# Altium PCB 10515.0461_全联供输出板_V1.0.PcbDoc (part 4 of 4)
Units mm, origin at the board's own origin, x right, y up, seen from the top; angles counter-clockwise.
Board outline 141.98 x 134.8 mm, 2 copper layers (Top Layer, Bottom Layer); 149 components, 131 nets, 632 pads, 485 vias.
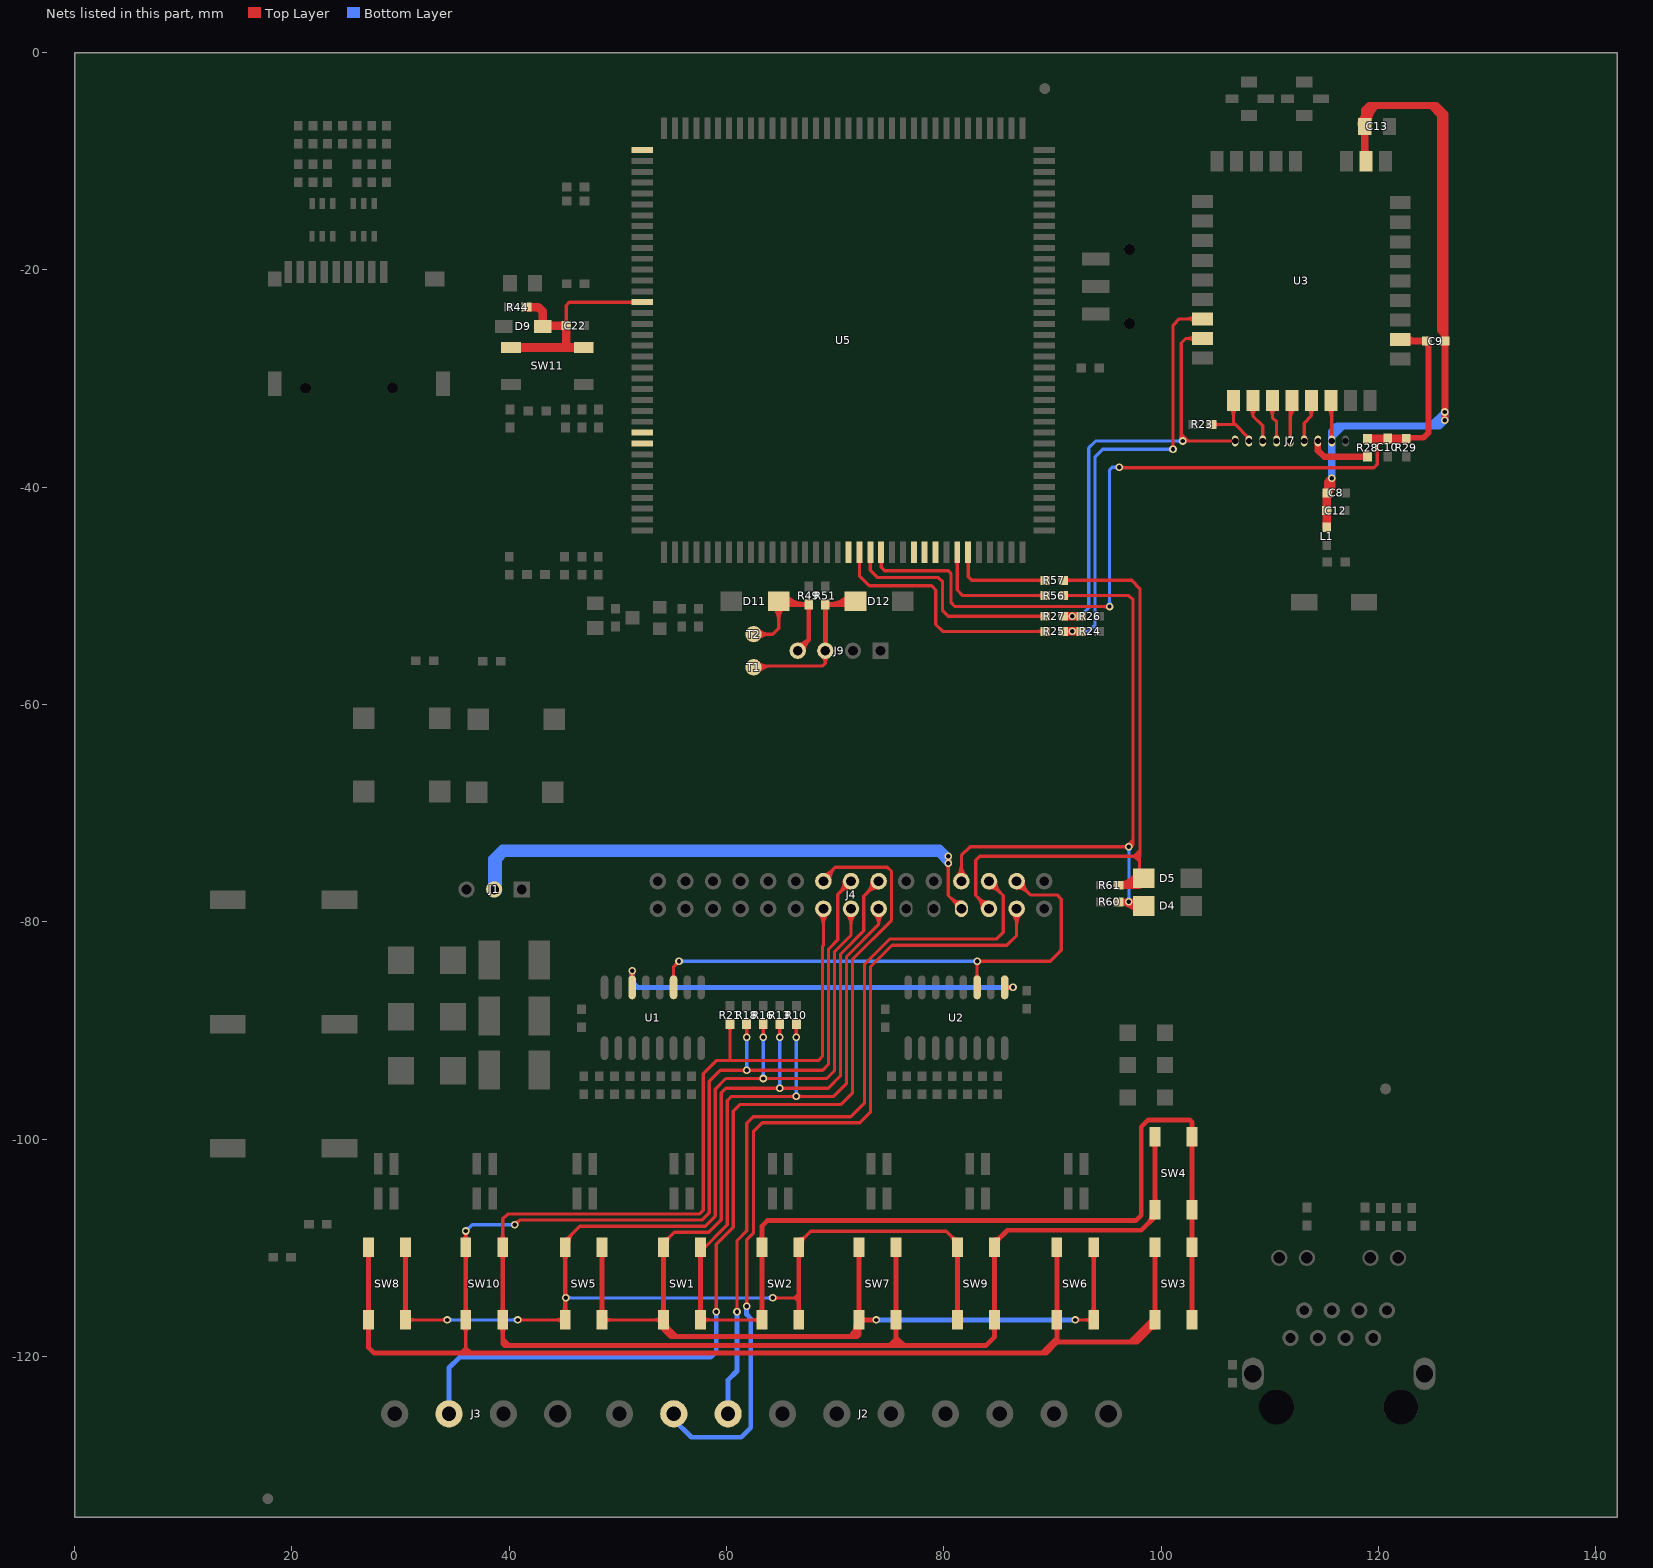
[diagram p4: the nets of this part, all layers, seen from the top]

## Via types
v1: diameter 0.7, hole 0.4, Top Layer to Bottom Layer, tented both sides, 485 vias

## Nets (pads, with @x,y where several pads share a name; then routed paths per layer and width w, separated by ;. In a path a pad name is that pad's centre, name@x,y a point inside that pad or via, vN(x,y) a via of type N, cw(c..) or ccw(c..) an arc to the next point about the centre after c; other vN are vias at no path point) (continued)
O_LED_SRCLK: J4.28 U1.11 U2.11 | length 57.8
  Top Layer w0.3: U1.11@54.977,-85.141 ccw(c54.635,-84.799) 55.118,-84.799 ccw(c55.601,-84.799) U1.11@55.259,-85.141 ; U1.11@55.118,-86.032 55.118,-84.127 v1(55.626,-83.619) ; v1@55.426,-83.619 cw(c54.943,-83.619) 55.285,-83.96 cw(c55.626,-84.302) v1@55.626,-83.819 ; U2.11@82.917,-85.141 ccw(c82.575,-84.799) 83.058,-84.799 ccw(c83.541,-84.799) U2.11@83.199,-85.141 ; v1@82.917,-83.76 cw(c82.575,-84.102) 83.058,-84.102 cw(c83.541,-84.102) 83.199,-83.76 cw(c83.541,-84.102) 83.541,-83.619 cw(c83.541,-83.136) v1@83.199,-83.478 ; U2.11@83.058,-86.032 v1(83.058,-83.619) 89.789,-83.619 90.805,-82.603 90.805,-77.904 90.424,-77.523 87.963,-77.523 J4.28@86.693,-76.253 ; J4.28@86.693,-76.865 cw(c86.693,-78.343) 87.738,-77.298 cw(c88.782,-76.253) J4.28@87.305,-76.253
  Bottom Layer w0.3: v1(55.626,-83.619) v1(83.058,-83.619) ; v1@55.767,-83.76 cw(c56.109,-84.102) 56.109,-83.619 cw(c56.109,-83.136) v1@55.767,-83.478 ; v1@82.917,-83.76 ccw(c82.575,-84.102) 82.575,-83.619 ccw(c82.575,-83.136) v1@82.917,-83.478
ONOFF: U5.1
OUTPUT_VOULTAGE: J3.3 J4.14 | length 96.6
  Top Layer w0.3: v1@58.914,-115.736 ccw(c58.572,-115.394) 59.055,-115.394 ccw(c59.538,-115.394) v1@59.196,-115.736 ; v1(59.055,-115.877) 59.055,-109.675 60.625,-108.105 60.625,-97.416 61.222,-96.819 70.493,-96.819 71.596,-95.716 71.596,-83.418 75.184,-79.83 75.184,-75.364 74.795,-74.975 69.985,-74.975 ; J4.14@68.913,-76.253 68.913,-76.047 69.985,-74.975 ; J4.14@68.913,-75.641 ccw(c68.913,-74.661) 69.606,-75.354 ; J4.14@69.224,-76.231 cw(c70.239,-76.16) 69.52,-75.44 ; J4.14@69.523,-76.21 cw(c71.108,-76.099) 69.985,-74.975
  Bottom Layer w0.45: J3.3@34.457,-125.275 34.457,-121.044 35.433,-120.068 58.547,-120.068 59.055,-119.56 v1(59.055,-115.877)
"PROG EN": J7.8 R23.2 U3.18 | length 9.6
  Top Layer w0.3: R23.2@104.629,-34.216 106.807,-34.216 ; R23.2@104.848,-34.397 cw(c105.286,-34.835) 105.286,-34.216 cw(c105.286,-33.597) R23.2@104.848,-34.035 ; U3.18@106.335,-32.676 cw(c105.567,-33.444) 106.653,-33.444 cw(c107.739,-33.444) U3.18@106.971,-32.676 ; U3.18@106.653,-32.008 106.653,-34.062 106.807,-34.216 ; 107.783,-35.192 cw(c107.434,-35.54) J7.8@107.927,-35.54 ; J7.8@108.077,-35.74 108.077,-35.486 106.807,-34.216
"PROG RESET": J7.3 R28.1 | length 5.7
  Top Layer w0.6: J7.3@114.427,-35.74 114.427,-36.629 114.998,-37.2 R28.1@118.999,-37.2
RESET_KEY: C22.2 D9.2 R44.1 SW11.1 SW11.2 U5.15 | length 24.7
  Top Layer w0.3: C22.2@45.056,-24.941 ccw(c44.618,-24.503) 45.237,-24.503 ccw(c45.856,-24.503) C22.2@45.419,-24.941 ; C22.2@45.237,-25.122 45.237,-23.269 45.537,-22.969 U5.15@52.232,-22.969 ; U5.15@51.419,-23.057 ccw(c51.205,-23.271) 51.205,-22.969 ccw(c51.205,-22.667) U5.15@51.419,-22.881
  Top Layer w0.8: SW11.2@40.16,-27.131 SW11.1@46.86,-27.131 ; R44.1@41.592,-23.421 42.672,-23.421 43.075,-23.824 D9.2@43.075,-25.199 ; D9.2@43.152,-25.122 C22.2@45.237,-25.122 45.237,-26.979 ; D9.2@43.416,-25.34 cw(c43.944,-25.868) 43.944,-25.122
RS485_CTRL3: U5.62
RS485_CTRL4: U5.54
RS485A2: J2.9 J4.27 | length 81.3
  Top Layer w0.3: v1@61.708,-115.228 ccw(c61.366,-114.886) 61.849,-114.886 ccw(c62.332,-114.886) v1@61.99,-115.228 ; v1@61.849,-115.242 61.849,-109.273 62.469,-108.653 62.469,-99.309 63.297,-98.481 72.26,-98.481 73.258,-97.483 73.258,-84.107 75.224,-82.141 85.806,-82.141 86.693,-81.254 J4.27@86.693,-78.793 ; J4.27@86.26,-79.226 cw(c85.215,-80.27) 86.693,-80.27 cw(c88.17,-80.27) J4.27@87.126,-79.226
  Bottom Layer w0.45: J2.9@55.144,-125.275 55.144,-125.809 56.769,-127.434 61.341,-127.434 62.23,-126.545 62.23,-116.512 61.849,-116.131 v1(61.849,-115.369)
RS485B2: J2.8 J4.26 | length 74.2
  Top Layer w0.3: v1@60.819,-115.736 ccw(c60.477,-115.394) 60.96,-115.394 ccw(c61.443,-115.394) v1@61.101,-115.736 ; v1(60.96,-115.877) 60.96,-109.337 61.849,-108.448 61.849,-98.533 62.455,-97.927 71.417,-97.927 72.704,-96.64 72.704,-83.877 74.994,-81.587 84.836,-81.587 85.471,-80.952 85.471,-77.571 J4.26@84.153,-76.253 ; J4.26@84.153,-76.865 cw(c84.153,-78.343) 85.198,-77.298 cw(c86.242,-76.253) J4.26@84.765,-76.253
  Bottom Layer w0.45: J2.8@60.144,-125.275 60.144,-122.154 60.96,-121.338 v1(60.96,-115.877)
RSDADIO3: J7.4 U3.22 | length 6.2
  Top Layer w0.3: J7.4@113.051,-35.434 ccw(c112.795,-35.178) 113.157,-35.178 ccw(c113.519,-35.178) J7.4@113.263,-35.434 ; J7.4@113.157,-35.74 113.157,-34.089 113.824,-33.422 ; U3.22@113.511,-32.681 cw(c112.793,-33.422) 113.824,-33.422 ; U3.22@113.824,-32.008 113.824,-33.422 ; U3.22@114.138,-32.681 ccw(c114.856,-33.422) 113.824,-33.422
RXD4: D4.1 J4.24 R56.2 R60.1 | length 65.9
  Top Layer w0.3: J4.24@81.18,-75.82 ccw(c80.135,-74.775) 81.613,-74.775 ccw(c83.09,-74.775) J4.24@82.046,-75.82 ; J4.24@81.613,-76.253 81.613,-73.888 82.423,-73.078 97.155,-73.078 97.417,-72.816 ; R56.2@90.995,-49.964 97.028,-49.964 97.417,-50.353 97.417,-72.443 ; R56.2@91.215,-50.145 cw(c91.653,-50.583) 91.653,-49.964 cw(c91.653,-49.345) R56.2@91.215,-49.783 ; v1@96.887,-73.219 ccw(c96.545,-73.561) 96.545,-73.078 ccw(c96.545,-72.595) v1@96.887,-72.937 ; v1@96.893,-72.959 96.901,-72.959 97.417,-72.443 ; v1@97.013,-72.879 ccw(c96.98,-72.443) 97.417,-72.443 ; v1@97.036,-73.178 ccw(c97.005,-72.766) 97.417,-72.766 ; v1@97.094,-72.889 ccw(c97.197,-72.596) 97.417,-72.816 ; v1@97.225,-73.045 cw(c97.903,-72.929) 97.417,-72.443 ; 97.417,-72.816 97.417,-72.443
  Top Layer w0.65: R60.1@95.948,-78.158 D4.1@98.273,-78.158 ; R60.1@95.992,-78.158 cw(c95.992,-80.847) D4.1@97.893,-78.946 ; D4.1@98.273,-78.412 D4.1@98.4,-78.539
  Bottom Layer w0.3: v1@96.887,-78.017 ccw(c96.545,-77.675) 97.028,-77.675 ccw(c97.511,-77.675) v1@97.169,-78.017 ; v1@96.887,-73.219 cw(c96.545,-73.561) 97.028,-73.561 cw(c97.511,-73.561) v1@97.169,-73.219 ; v1(97.028,-78.158) v1(97.028,-73.078)
SCLKDIO1: J7.6 U3.20 | length 6.2
  Top Layer w0.3: U3.20@109.921,-32.676 cw(c109.152,-33.444) 110.239,-33.444 cw(c111.325,-33.444) U3.20@110.557,-32.676 ; U3.20@110.239,-32.008 110.239,-33.584 110.617,-33.962 J7.6@110.617,-35.74 ; J7.6@110.511,-35.434 ccw(c110.255,-35.178) 110.617,-35.178 ccw(c110.979,-35.178) J7.6@110.723,-35.434
SCSEDIO0: J7.7 U3.19 | length 6.4
  Top Layer w0.3: U3.19@108.128,-32.677 cw(c107.366,-33.442) 108.446,-33.442 ; U3.19@108.446,-32.008 108.446,-33.442 ; U3.19@108.764,-32.677 ccw(c109.526,-33.442) 108.446,-33.442 ; J7.7@109.241,-35.434 ccw(c108.985,-35.178) 109.347,-35.178 ccw(c109.709,-35.178) J7.7@109.453,-35.434 ; J7.7@109.347,-35.74 109.347,-34.343 108.446,-33.442
SER_OUT: U1.14 U2.9 | length 38.6
  Top Layer w0.45: U1.14@51.308,-86.032 v1(51.308,-84.508) ; U2.9@85.598,-86.032 v1(86.36,-86.032)
  Bottom Layer w0.45: v1(51.308,-84.508) 51.308,-85.524 51.816,-86.032 v1(86.36,-86.032)
SW1: J4.17 R10.1 SW1.1 SW1.2 SW2.1 SW2.2 SW3.1 SW3.2 SW4.1 SW4.2 | length 160.9
  Top Layer w0.3: SW1.1@57.599,-116.636 SW2.2@63.248,-116.636 SW2.2@63.248,-117.149 ; SW1.2@57.599,-110.348 60.071,-107.876 60.071,-96.446 60.452,-96.065 69.85,-96.065 71.042,-94.873 71.042,-83.189 73.993,-80.238 ; SW1.1@57.847,-116.884 cw(c58.444,-117.481) 58.444,-116.636 cw(c58.444,-115.791) SW1.1@57.847,-116.389 ; SW2.2@63,-116.884 ccw(c62.403,-117.481) 62.403,-116.636 ccw(c62.403,-115.791) SW2.2@63,-116.389 ; SW2.1@63.248,-109.936 SW2.1@63.248,-109.529 ; R10.1@66.24,-89.617 cw(c65.802,-90.055) 66.421,-90.055 cw(c67.04,-90.055) R10.1@66.602,-89.617 ; v1@66.28,-96.206 ccw(c65.938,-96.548) 65.938,-96.065 ccw(c65.938,-95.582) v1@66.28,-95.924 ; v1@66.28,-90.463 ccw(c65.938,-90.121) 66.421,-90.121 ccw(c66.904,-90.121) v1@66.562,-90.463 ; v1(66.421,-90.604) R10.1@66.421,-89.397 ; v1@66.562,-96.206 cw(c66.904,-96.548) 66.904,-96.065 cw(c66.904,-95.582) v1@66.562,-95.924 ; J4.17@73.567,-79.233 cw(c72.593,-80.238) 73.993,-80.238 ; J4.17@73.993,-78.793 73.993,-80.238 ; J4.17@74.419,-79.233 ccw(c75.393,-80.238) 73.993,-80.238
  Top Layer w0.45: SW1.1@57.405,-116.042 ccw(c56.935,-115.572) 57.599,-115.572 ccw(c58.263,-115.572) SW1.1@57.794,-116.042 ; SW1.2@57.405,-110.531 cw(c56.935,-111) 57.599,-111 cw(c58.263,-111) SW1.2@57.794,-110.531 ; SW1.1@57.599,-116.636 SW1.2@57.599,-110.348 ; SW2.2@63.053,-116.042 ccw(c62.584,-115.572) 63.248,-115.572 ccw(c63.912,-115.572) SW2.2@63.442,-116.042 ; SW2.1@63.053,-110.531 cw(c62.584,-111) 63.248,-111 cw(c63.912,-111) SW2.1@63.442,-110.531 ; SW2.1@63.053,-109.342 ccw(c62.584,-108.872) 63.248,-108.872 ccw(c63.912,-108.872) SW2.1@63.442,-109.342 ; SW2.2@63.248,-116.636 SW2.1@63.248,-109.936 63.248,-108.001 63.754,-107.495 97.663,-107.495 98.171,-106.987 98.171,-98.859 98.806,-98.224 102.616,-98.224 102.843,-98.451 SW4.2@102.843,-99.776 SW4.1@102.843,-106.476 SW3.2@102.843,-109.936 SW3.1@102.843,-116.636 ; SW3.1@102.648,-116.042 ccw(c102.179,-115.572) 102.843,-115.572 ccw(c103.507,-115.572) SW3.1@103.037,-116.042 ; SW3.2@102.648,-110.531 cw(c102.179,-111) 102.843,-111 cw(c103.507,-111) SW3.2@103.037,-110.531 ; SW3.2@102.648,-109.342 ccw(c102.179,-108.872) 102.843,-108.872 ccw(c103.507,-108.872) SW3.2@103.037,-109.342 ; SW4.1@102.648,-107.071 cw(c102.179,-107.54) 102.843,-107.54 cw(c103.507,-107.54) SW4.1@103.037,-107.071 ; SW4.1@102.648,-105.882 ccw(c102.179,-105.412) 102.843,-105.412 ccw(c103.507,-105.412) SW4.1@103.037,-105.882 ; SW4.2@102.648,-100.371 cw(c102.179,-100.84) 102.843,-100.84 cw(c103.507,-100.84) SW4.2@103.037,-100.371 ; SW4.2@102.648,-99.182 ccw(c102.179,-98.712) 102.843,-98.712 ccw(c103.507,-98.712) SW4.2@103.037,-99.182
  Bottom Layer w0.3: v1@66.28,-95.924 ccw(c65.938,-95.582) 66.421,-95.582 ccw(c66.904,-95.582) v1@66.562,-95.924 ; v1@66.28,-90.745 cw(c65.938,-91.087) 66.421,-91.087 cw(c66.904,-91.087) v1@66.562,-90.745 ; v1(66.421,-96.065) v1(66.421,-90.604)
SW2: J4.18 R13.1 SW1.3 SW1.4 SW5.1 SW5.2 SW6.1 SW6.2 SW7.1 SW7.2 | length 158.5
  Top Layer w0.3: SW5.1@48.55,-116.636 SW1.4@54.199,-116.636 ; SW5.1@48.798,-116.884 cw(c49.395,-117.481) 49.395,-116.636 cw(c49.395,-115.791) SW5.1@48.798,-116.389 ; SW1.4@53.952,-116.884 ccw(c53.354,-117.481) 53.354,-116.636 ccw(c53.354,-115.791) SW1.4@53.952,-116.389 ; SW1.3@54.199,-109.936 54.199,-109.557 55.199,-108.557 58.374,-108.557 59.517,-107.414 59.517,-95.73 59.944,-95.303 63.627,-95.303 69.342,-95.303 70.488,-94.157 70.488,-82.96 72.619,-80.829 72.619,-77.627 J4.18@73.993,-76.253 ; SW1.3@54.199,-109.186 ccw(c54.199,-108.291) 54.832,-108.924 ; SW1.3@54.549,-109.536 cw(c55.344,-109.536) 54.782,-108.974 ; R13.1@64.716,-89.617 cw(c64.278,-90.055) 64.897,-90.055 cw(c65.516,-90.055) R13.1@65.078,-89.617 ; v1@64.756,-95.444 ccw(c64.414,-95.786) 64.414,-95.303 ccw(c64.414,-94.82) v1@64.756,-95.162 ; v1@64.756,-90.463 ccw(c64.414,-90.121) 64.897,-90.121 ccw(c65.38,-90.121) v1@65.038,-90.463 ; v1(64.897,-90.604) R13.1@64.897,-89.397 ; v1@65.038,-95.444 cw(c65.38,-95.786) 65.38,-95.303 cw(c65.38,-94.82) v1@65.038,-95.162 ; J4.18@73.381,-76.253 cw(c71.903,-76.253) 72.948,-77.298 cw(c73.993,-78.343) J4.18@73.993,-76.865 ; v1(92.078,-116.636) SW6.1@93.794,-116.636 ; v1@92.219,-116.778 cw(c92.561,-117.119) 92.561,-116.636 cw(c92.561,-116.153) v1@92.219,-116.495 ; SW6.1@93.547,-116.884 ccw(c92.949,-117.481) 92.949,-116.636 ccw(c92.949,-115.791) SW6.1@93.547,-116.389
  Top Layer w0.45: SW5.1@48.356,-116.042 ccw(c47.886,-115.572) 48.55,-115.572 ccw(c49.214,-115.572) SW5.1@48.745,-116.042 ; SW5.2@48.356,-110.531 cw(c47.886,-111) 48.55,-111 cw(c49.214,-111) SW5.2@48.745,-110.531 ; SW5.1@48.55,-116.636 SW5.2@48.55,-109.936 ; SW1.4@54.005,-116.042 ccw(c53.535,-115.572) 54.199,-115.572 ccw(c54.863,-115.572) SW1.4@54.394,-116.042 ; SW1.3@54.005,-110.531 cw(c53.535,-111) 54.199,-111 cw(c54.863,-111) SW1.3@54.394,-110.531 ; SW1.4@54.199,-117.498 54.864,-118.163 55.372,-118.163 ; SW1.4@54.199,-117.311 cw(c54.199,-118.087) 54.747,-117.538 ; SW1.3@54.199,-109.936 SW1.4@54.199,-116.636 54.199,-116.99 55.372,-118.163 ; SW1.4@54.457,-117.131 ccw(c55.171,-117.394) 54.633,-117.932 ; SW1.4@54.474,-117.036 ccw(c55.027,-117.036) SW1.4@54.636,-117.427 ; 71.527,-118.01 ccw(c70.578,-117.061) SW7.2@71.92,-117.04 ; SW7.2@72,-117.231 cw(c71.531,-117.7) 72.195,-117.7 cw(c72.859,-117.7) SW7.2@72.389,-117.231 ; SW7.2@72,-116.042 ccw(c71.531,-115.572) 72.195,-115.572 ccw(c72.859,-115.572) SW7.2@72.389,-116.042 ; SW7.1@72,-110.531 cw(c71.531,-111) 72.195,-111 cw(c72.859,-111) SW7.1@72.389,-110.531 ; SW7.2@72.136,-117.401 71.374,-118.163 ; SW7.1@72.195,-109.936 SW7.2@72.195,-116.636 ; SW7.2@72.389,-116.831 cw(c72.859,-117.3) 72.859,-116.636 cw(c72.859,-115.972) SW7.2@72.389,-116.442 ; v1(73.784,-116.636) SW7.2@72.195,-116.636 ; SW6.1@93.6,-116.042 ccw(c93.13,-115.572) 93.794,-115.572 ccw(c94.458,-115.572) SW6.1@93.989,-116.042 ; SW6.2@93.6,-110.531 cw(c93.13,-111) 93.794,-111 cw(c94.458,-111) SW6.2@93.989,-110.531 ; SW6.1@93.794,-116.636 SW6.2@93.794,-109.936 ; 55.372,-118.163 71.374,-118.163 ; 71.374,-118.163 72.009,-118.163 72.195,-117.977 SW7.2@72.195,-116.636
  Bottom Layer w0.3: v1@64.756,-95.162 ccw(c64.414,-94.82) 64.897,-94.82 ccw(c65.38,-94.82) v1@65.038,-95.162 ; v1@64.756,-90.745 cw(c64.414,-91.087) 64.897,-91.087 cw(c65.38,-91.087) v1@65.038,-90.745 ; v1(64.897,-95.303) v1(64.897,-90.604)
  Bottom Layer w0.45: v1(73.784,-116.636) v1(92.078,-116.636)
SW3: J4.15 R16.1 SW2.3 SW2.4 SW5.3 SW5.4 SW8.1 SW8.2 SW9.1 SW9.2 | length 167.8
  Top Layer w0.3: SW8.1@30.453,-116.636 v1(34.29,-116.636) ; SW8.1@30.7,-116.884 cw(c31.298,-117.481) 31.298,-116.636 cw(c31.298,-115.791) SW8.1@30.7,-116.389 ; v1@34.149,-116.778 ccw(c33.807,-117.119) 33.807,-116.636 ccw(c33.807,-116.153) v1@34.149,-116.495 ; v1(40.767,-116.636) SW5.4@45.15,-116.636 ; v1@40.908,-116.778 cw(c41.25,-117.119) 41.25,-116.636 cw(c41.25,-116.153) v1@40.908,-116.495 ; SW5.4@44.903,-116.884 ccw(c44.305,-117.481) 44.305,-116.636 ccw(c44.305,-115.791) SW5.4@44.903,-116.389 ; SW5.3@45.15,-109.335 46.482,-108.003 58.039,-108.003 58.963,-107.079 58.963,-95.395 59.944,-94.414 69.215,-94.414 69.934,-93.695 69.934,-82.73 71.453,-81.211 J4.15@71.453,-78.793 ; SW5.3@45.15,-109.186 ccw(c45.15,-108.828) SW5.3@45.404,-109.081 ; SW5.3@45.5,-109.536 cw(c46.832,-109.536) 45.89,-108.595 ; R16.1@63.192,-89.617 cw(c62.754,-90.055) 63.373,-90.055 cw(c63.992,-90.055) R16.1@63.554,-89.617 ; v1@63.232,-94.555 ccw(c62.89,-94.897) 62.89,-94.414 ccw(c62.89,-93.931) v1@63.232,-94.273 ; v1@63.232,-90.463 ccw(c62.89,-90.121) 63.373,-90.121 ccw(c63.856,-90.121) v1@63.514,-90.463 ; v1(63.373,-90.604) R16.1@63.373,-89.397 ; v1@63.514,-94.555 cw(c63.856,-94.897) 63.856,-94.414 cw(c63.856,-93.931) v1@63.514,-94.273 ; v1(64.262,-114.607) 66.167,-114.607 ; v1@64.403,-114.748 cw(c64.745,-115.09) 64.745,-114.607 cw(c64.745,-114.124) v1@64.403,-114.466 ; 66.648,-114.988 66.267,-114.607 ; 66.648,-114.607 66.167,-114.607 ; 66.648,-114.226 66.267,-114.607 ; SW2.4@66.648,-109.936 66.648,-109.554 67.727,-108.475 80.228,-108.475 81.244,-109.491 SW9.1@81.244,-109.936 ; SW2.4@66.648,-109.186 ccw(c66.648,-108.298) 67.276,-108.926 ; SW2.4@66.998,-109.536 cw(c67.799,-109.536) 67.233,-108.969 ; J4.15@71.02,-79.226 cw(c69.975,-80.27) 71.453,-80.27 cw(c72.93,-80.27) J4.15@71.886,-79.226 ; 80.614,-108.861 cw(c79.939,-109.536) SW9.1@80.894,-109.536 ; 80.724,-108.971 ccw(c81.244,-108.451) SW9.1@81.244,-109.186 ; 66.167,-114.607 66.267,-114.607
  Top Layer w0.45: SW8.1@30.258,-116.042 ccw(c29.789,-115.572) 30.453,-115.572 ccw(c31.117,-115.572) SW8.1@30.647,-116.042 ; SW8.2@30.258,-110.531 cw(c29.789,-111) 30.453,-111 cw(c31.117,-111) SW8.2@30.647,-110.531 ; SW8.1@30.453,-116.636 SW8.2@30.453,-109.936 ; SW5.4@44.956,-116.042 ccw(c44.486,-115.572) 45.15,-115.572 ccw(c45.814,-115.572) SW5.4@45.345,-116.042 ; SW5.3@44.956,-110.531 cw(c44.486,-111) 45.15,-111 cw(c45.814,-111) SW5.3@45.345,-110.531 ; SW5.4@45.15,-116.636 SW5.3@45.15,-109.936 SW5.3@45.15,-109.335 ; 45.15,-115.058 cw(c45.663,-115.058) v1@45.3,-114.695 ; 45.15,-114.156 ccw(c45.663,-114.156) v1@45.3,-114.519 ; SW2.3@66.453,-116.042 ccw(c65.984,-115.572) 66.648,-115.572 ccw(c67.312,-115.572) SW2.3@66.842,-116.042 ; SW2.4@66.453,-110.531 cw(c65.984,-111) 66.648,-111 cw(c67.312,-111) SW2.4@66.842,-110.531 ; SW2.3@66.648,-116.636 66.648,-114.607 SW2.4@66.648,-109.936 ; SW9.2@81.049,-116.042 ccw(c80.58,-115.572) 81.244,-115.572 ccw(c81.908,-115.572) SW9.2@81.438,-116.042 ; SW9.1@81.049,-110.531 cw(c80.58,-111) 81.244,-111 cw(c81.908,-111) SW9.1@81.438,-110.531 ; SW9.2@81.244,-116.636 SW9.1@81.244,-109.936
  Bottom Layer w0.3: v1(34.29,-116.636) v1(40.767,-116.636) ; v1@34.431,-116.778 cw(c34.773,-117.119) 34.773,-116.636 cw(c34.773,-116.153) v1@34.431,-116.495 ; v1@40.626,-116.778 ccw(c40.284,-117.119) 40.284,-116.636 ccw(c40.284,-116.153) v1@40.626,-116.495 ; v1(45.212,-114.607) v1(64.262,-114.607) ; v1@45.353,-114.748 cw(c45.695,-115.09) 45.695,-114.607 cw(c45.695,-114.124) v1@45.353,-114.466 ; v1@63.232,-94.273 ccw(c62.89,-93.931) 63.373,-93.931 ccw(c63.856,-93.931) v1@63.514,-94.273 ; v1@63.232,-90.745 cw(c62.89,-91.087) 63.373,-91.087 cw(c63.856,-91.087) v1@63.514,-90.745 ; v1(63.373,-94.414) v1(63.373,-90.604) ; v1@64.121,-114.748 ccw(c63.779,-115.09) 63.779,-114.607 ccw(c63.779,-114.124) v1@64.121,-114.466
SW4: J4.16 R18.1 SW3.3 SW3.4 SW6.3 SW6.4 SW8.3 SW8.4 SW10.1 SW10.2 | length 211.3
  Top Layer w0.3: 35.492,-119.687 36,-119.179 ; SW10.2@35.752,-117.284 cw(c35.155,-117.881) 36,-117.881 cw(c36.845,-117.881) SW10.2@36.247,-117.284 ; SW10.1@35.752,-109.289 ccw(c35.155,-108.691) 36,-108.691 ccw(c36.845,-108.691) SW10.1@36.247,-109.289 ; v1@35.859,-108.593 cw(c35.517,-108.935) 36,-108.935 cw(c36.483,-108.935) v1@36.141,-108.593 ; 36,-119.619 36,-119.179 ; SW10.2@36,-116.636 36,-119.179 ; SW10.1@36,-109.936 v1(36,-108.452) ; 36.449,-119.628 36,-119.179 ; v1(40.513,-107.876) 40.94,-107.449 57.725,-107.449 58.409,-106.765 58.409,-94.679 59.436,-93.652 68.834,-93.652 69.38,-93.106 69.38,-82.501 70.231,-81.65 70.231,-77.475 J4.16@71.453,-76.253 ; v1@40.513,-107.676 ccw(c40.513,-107.193) 40.854,-107.535 ccw(c41.196,-107.876) v1@40.713,-107.876 ; R18.1@61.668,-89.617 cw(c61.23,-90.055) 61.849,-90.055 cw(c62.468,-90.055) R18.1@62.03,-89.617 ; v1@61.708,-93.793 ccw(c61.366,-94.135) 61.366,-93.652 ccw(c61.366,-93.169) v1@61.708,-93.511 ; v1@61.708,-90.463 ccw(c61.366,-90.121) 61.849,-90.121 ccw(c62.332,-90.121) v1@61.99,-90.463 ; v1(61.849,-90.604) R18.1@61.849,-89.397 ; v1@61.99,-93.793 cw(c62.332,-94.135) 62.332,-93.652 cw(c62.332,-93.169) v1@61.99,-93.511 ; J4.16@70.841,-76.253 cw(c69.363,-76.253) 70.408,-77.298 cw(c71.453,-78.343) J4.16@71.453,-76.865
  Top Layer w0.45: SW8.4@26.858,-117.231 cw(c26.389,-117.7) 27.053,-117.7 cw(c27.717,-117.7) SW8.4@27.247,-117.231 ; SW8.4@26.858,-116.042 ccw(c26.389,-115.572) 27.053,-115.572 ccw(c27.717,-115.572) SW8.4@27.247,-116.042 ; SW8.3@26.858,-110.531 cw(c26.389,-111) 27.053,-111 cw(c27.717,-111) SW8.3@27.247,-110.531 ; SW8.3@27.053,-109.936 SW8.4@27.053,-116.636 27.053,-119.181 27.559,-119.687 89.408,-119.687 90.394,-118.701 90.394,-118.671 ; SW10.2@35.805,-116.042 ccw(c35.336,-115.572) 36,-115.572 ccw(c36.664,-115.572) SW10.2@36.194,-116.042 ; SW10.1@35.805,-110.531 cw(c35.336,-111) 36,-111 cw(c36.664,-111) SW10.1@36.194,-110.531 ; SW10.2@36,-116.001 SW10.1@36,-109.936 ; 89.027,-119.687 90.394,-118.32 90.394,-118.163 ; SW6.4@90.2,-117.231 cw(c89.73,-117.7) 90.394,-117.7 cw(c91.058,-117.7) SW6.4@90.589,-117.231 ; SW6.4@90.2,-116.042 ccw(c89.73,-115.572) 90.394,-115.572 ccw(c91.058,-115.572) SW6.4@90.589,-116.042 ; SW6.3@90.2,-110.531 cw(c89.73,-111) 90.394,-111 cw(c91.058,-111) SW6.3@90.589,-110.531 ; SW6.3@90.394,-109.936 SW6.4@90.394,-116.636 90.394,-118.163 ; 97.859,-117.967 cw(c99.443,-119.552) 99.443,-117.311 ccw(c99.443,-118.019) 98.943,-117.518 ; 98.627,-117.199 cw(c99.443,-118.015) SW3.4@99.443,-116.861 ; SW3.4@98.986,-117.475 ccw(c98.547,-117.036) SW3.4@99.168,-117.036 ; SW3.4@99.19,-116.636 97.155,-118.671 ; SW3.4@99.248,-116.042 ccw(c98.779,-115.572) 99.443,-115.572 ccw(c100.107,-115.572) SW3.4@99.637,-116.042 ; SW3.3@99.248,-110.531 cw(c98.779,-111) 99.443,-111 cw(c100.107,-111) SW3.3@99.637,-110.531 ; SW3.3@99.443,-109.936 SW3.4@99.443,-116.636 99.443,-117.018 97.79,-118.671 97.155,-118.671 ; 90.394,-118.671 97.155,-118.671 ; 90.394,-118.671 90.394,-118.163
  Bottom Layer w0.3: v1(36,-108.452) 36.576,-107.876 v1(40.513,-107.876) ; v1@36,-108.252 ccw(c36,-107.769) 36.341,-108.111 ccw(c36.683,-108.452) v1@36.2,-108.452 ; v1@40.372,-108.017 ccw(c40.03,-108.359) 40.03,-107.876 ccw(c40.03,-107.393) v1@40.372,-107.735 ; v1@61.708,-93.511 ccw(c61.366,-93.169) 61.849,-93.169 ccw(c62.332,-93.169) v1@61.99,-93.511 ; v1@61.708,-90.745 cw(c61.366,-91.087) 61.849,-91.087 cw(c62.332,-91.087) v1@61.99,-90.745 ; v1(61.849,-93.652) v1(61.849,-90.604)
SW5: J4.13 R21.1 SW4.3 SW4.4 SW7.3 SW7.4 SW9.3 SW9.4 SW10.3 SW10.4 | length 178.5
  Top Layer w0.3: SW10.4@39.152,-109.289 ccw(c38.555,-108.691) 39.4,-108.691 ccw(c40.245,-108.691) SW10.4@39.647,-109.289 ; SW10.4@39.4,-109.936 39.4,-107.338 39.843,-106.895 57.496,-106.895 57.855,-106.536 57.855,-93.963 59.055,-92.763 68.453,-92.763 68.826,-92.39 68.826,-82.271 68.913,-82.184 J4.13@68.913,-78.793 ; R21.1@60.144,-89.617 cw(c59.706,-90.055) 60.325,-90.055 cw(c60.944,-90.055) R21.1@60.506,-89.617 ; 60.325,-92.763 R21.1@60.325,-89.397 ; J4.13@68.48,-79.226 cw(c67.435,-80.27) 68.913,-80.27 cw(c70.39,-80.27) J4.13@69.346,-79.226
  Top Layer w0.45: SW10.3@39.205,-117.231 cw(c38.736,-117.7) 39.4,-117.7 cw(c40.064,-117.7) SW10.3@39.594,-117.231 ; SW10.3@39.205,-116.042 ccw(c38.736,-115.572) 39.4,-115.572 ccw(c40.064,-115.572) SW10.3@39.594,-116.042 ; SW10.4@39.205,-110.531 cw(c38.736,-111) 39.4,-111 cw(c40.064,-111) SW10.4@39.594,-110.531 ; SW10.4@39.4,-109.936 SW10.3@39.4,-116.636 39.4,-118.417 ; 39.966,-118.983 39.4,-118.417 ; 75.029,-118.983 75.595,-118.417 ; SW7.3@75.4,-117.231 cw(c74.931,-117.7) 75.595,-117.7 cw(c76.259,-117.7) SW7.3@75.789,-117.231 ; SW7.3@75.4,-116.042 ccw(c74.931,-115.572) 75.595,-115.572 ccw(c76.259,-115.572) SW7.3@75.789,-116.042 ; SW7.4@75.4,-110.531 cw(c74.931,-111) 75.595,-111 cw(c76.259,-111) SW7.4@75.789,-110.531 ; 75.595,-118.886 75.595,-118.417 ; SW7.4@75.595,-109.936 SW7.3@75.595,-116.636 75.595,-118.417 ; 76.327,-118.983 75.761,-118.417 75.595,-118.417 ; SW9.3@84.449,-117.231 cw(c83.98,-117.7) 84.644,-117.7 cw(c85.308,-117.7) SW9.3@84.838,-117.231 ; SW9.3@84.449,-116.042 ccw(c83.98,-115.572) 84.644,-115.572 ccw(c85.308,-115.572) SW9.3@84.838,-116.042 ; SW9.4@84.449,-110.531 cw(c83.98,-111) 84.644,-111 cw(c85.308,-111) SW9.4@84.838,-110.531 ; SW9.4@84.644,-109.261 ccw(c84.644,-108.462) 85.209,-109.027 ; SW9.4@84.919,-109.536 cw(c85.447,-109.536) SW9.4@85.073,-109.163 ; 98.806,-107.749 ccw(c97.934,-106.876) SW4.4@99.168,-106.876 ; SW4.4@99.248,-105.882 ccw(c98.779,-105.412) 99.443,-105.412 ccw(c100.107,-105.412) SW4.4@99.637,-105.882 ; SW4.3@99.248,-100.371 cw(c98.779,-100.84) 99.443,-100.84 cw(c100.107,-100.84) SW4.3@99.637,-100.371 ; SW4.3@99.443,-99.776 SW4.4@99.443,-106.476 99.443,-107.112 98.171,-108.384 85.852,-108.384 84.644,-109.592 SW9.4@84.644,-109.936 SW9.3@84.644,-116.636 84.644,-118.228 83.889,-118.983 39.555,-118.983 39.4,-118.828 39.4,-118.417
"TCM310 RESET": C9.1 C10.2 R28.2 R29.2 U3.27 U5.57 | length 102.3
  Top Layer w0.3: U5.57@74.144,-46.782 cw(c73.93,-46.996) 74.232,-46.996 cw(c74.534,-46.996) U5.57@74.32,-46.782 ; U5.57@74.232,-45.969 74.232,-47.361 74.549,-47.678 80.391,-47.678 80.645,-47.932 80.645,-50.599 81.026,-50.98 v1(95.25,-50.98) ; v1@95.109,-51.121 ccw(c94.767,-51.463) 94.767,-50.98 ccw(c94.767,-50.497) v1@95.109,-50.839 ; v1@96.187,-38.201 118.999,-38.201 119.586,-38.201 119.888,-37.899 119.888,-35.549 ; v1@96.28,-38.294 cw(c96.505,-38.519) 96.505,-38.201 ; v1@96.28,-38.012 ccw(c96.739,-37.553) 96.739,-38.201 ; R29.2@122.736,-35.731 cw(c123.174,-36.169) 123.174,-35.549 cw(c123.174,-34.93) R29.2@122.736,-35.368 ; R29.2@122.736,-35.693 cw(c123.542,-36.498) 123.542,-35.359 ; C9.1@124.272,-26.408 124.41,-26.546 124.714,-26.85 124.714,-35.03 124.194,-35.549 122.174,-35.549 122.364,-35.549 122.555,-35.359 124.079,-35.359 124.46,-34.978 C9.1@124.46,-26.596 ; 124.46,-27.196 cw(c125.122,-27.196) C9.1@124.654,-26.727 ; 124.46,-27.134 ccw(c123.884,-27.134) 124.291,-26.727 cw(c123.271,-27.748) 124.714,-27.748 ; C9.1@124.504,-26.515 cw(c123.995,-27.023) 124.714,-27.023
  Top Layer w0.65: U3.27@122.003,-26.408 122.141,-26.546 124.41,-26.546 C9.1@124.435,-26.546 ; U3.27@122.547,-26.214 ccw(c123.35,-25.411) 123.35,-26.546
  Top Layer w0.8: R28.2@118.999,-35.549 119.888,-35.549 R29.2@122.174,-35.549
  Bottom Layer w0.3: v1@95.109,-50.839 ccw(c94.767,-50.497) 95.25,-50.497 ccw(c95.733,-50.497) v1@95.391,-50.839 ; v1(95.25,-50.98) 95.25,-38.407 95.504,-38.153 v1(96.139,-38.153) ; v1@95.998,-38.294 ccw(c95.656,-38.636) 95.656,-38.153 ccw(c95.656,-37.67) v1@95.998,-38.012
TCM310_RXD: R24.1 R25.2 U3.15 | length 45.3
  Top Layer w0.3: v1@100.951,-36.361 ccw(c100.609,-36.019) 101.092,-36.019 ccw(c101.575,-36.019) v1@101.233,-36.361 ; v1(101.092,-36.502) 101.092,-25.072 101.656,-24.508 U3.15@103.803,-24.508 ; U3.15@103.135,-24.826 ccw(c102.367,-25.594) 102.367,-24.508 ccw(c102.367,-23.422) U3.15@103.135,-24.19
  Top Layer w0.8: R25.2@90.995,-53.266 v1(91.821,-53.266) R24.1@92.646,-53.266
  Bottom Layer w0.3: v1(91.821,-53.266) 93.345,-53.266 93.899,-52.712 93.899,-37.218 94.615,-36.502 v1(101.092,-36.502) ; v1@91.962,-53.407 cw(c92.304,-53.749) 92.304,-53.266 cw(c92.304,-52.783) v1@91.962,-53.125 ; v1@100.951,-36.643 ccw(c100.609,-36.985) 100.609,-36.502 ccw(c100.609,-36.019) v1@100.951,-36.361
TCM310_TXD: J7.9 R26.1 R27.2 U3.16 | length 52.2
  Top Layer w0.3: 101.776,-35.396 cw(c101.953,-35.694) 102.198,-35.449 ; v1@101.93,-35.654 cw(c102.157,-36.035) 102.47,-35.721 ; 101.941,-35.192 cw(c101.542,-35.59) v1@102.076,-35.772 ; v1@102.097,-35.577 cw(c102.434,-35.105) 101.854,-35.105 ; v1@102.122,-35.881 cw(c102.464,-36.223) 102.464,-35.74 cw(c102.464,-35.257) v1@102.122,-35.599 ; 102.743,-35.74 102.489,-35.74 101.854,-35.105 ; U3.16@103.135,-26.626 ccw(c102.367,-27.394) 102.367,-26.308 ccw(c102.367,-25.222) U3.16@103.135,-25.99 ; U3.16@103.803,-26.308 102.269,-26.308 101.854,-26.723 101.854,-35.105 ; J7.9@106.701,-35.846 ccw(c106.445,-36.102) 106.445,-35.74 ccw(c106.445,-35.378) J7.9@106.701,-35.634 ; J7.9@106.807,-35.74 v1@102.235,-35.74 ; 101.854,-35.359 ccw(c102.039,-35.359) 102.011,-35.542 cw(c102.039,-35.359) 101.854,-35.359 ; 101.854,-35.359 v1@102.235,-35.74 ; 101.854,-35.359 101.854,-35.105 ; 101.854,-35.359 101.854,-35.74 v1@102.235,-35.74
  Top Layer w0.8: R27.2@90.995,-51.869 v1(91.821,-51.869) R26.1@92.646,-51.869
  Bottom Layer w0.3: v1(91.821,-51.869) 92.583,-51.869 93.345,-51.107 93.345,-38.153 93.345,-36.375 93.98,-35.74 v1(101.981,-35.74) ; v1@91.962,-52.01 cw(c92.304,-52.352) 92.304,-51.869 cw(c92.304,-51.386) v1@91.962,-51.728 ; v1@101.84,-35.881 ccw(c101.498,-36.223) 101.498,-35.74 ccw(c101.498,-35.257) v1@101.84,-35.599
TCM310_VDD: C8.1 C9.2 C12.2 C13.2 J7.2 L1.2 U3.2 U3.23 | length 104.1
  Top Layer w0.3: U3.23@115.299,-32.676 cw(c114.338,-33.637) 115.697,-33.637 ; J7.2@115.591,-35.434 ccw(c115.335,-35.178) 115.697,-35.178 ccw(c116.059,-35.178) J7.2@115.803,-35.434 ; U3.23@115.617,-32.008 115.697,-32.088 J7.2@115.697,-35.74 ; 115.697,-33.252 cw(c116.511,-33.252) U3.23@115.935,-32.676 ; U3.2@118.853,-10.008 U3.2@118.853,-9.89
  Top Layer w0.65: C8.1@115.271,-40.458 ccw(c114.243,-39.43) v1@115.697,-39.43 ; C8.1@115.291,-40.21 cw(c116.738,-40.21) v1@115.715,-39.187 ; 115.291,-39.744 cw(c115.864,-39.744) v1@115.704,-39.193 ; C13.2@118.36,-6.632 cw(c119.234,-6.632) 118.616,-6.014 ; C13.2@118.541,-7.15 cw(c118.071,-7.62) 118.735,-7.62 cw(c119.399,-7.62) C13.2@118.929,-7.15 ; C13.2@118.541,-6.438 ccw(c118.071,-5.968) 118.735,-5.968 ccw(c119.399,-5.968) C13.2@118.929,-6.438 ; U3.2@118.735,-9.89 C13.2@118.735,-6.794 118.735,-5.27 119.126,-4.879 120.015,-4.879 ; 118.735,-8.709 ccw(c119.802,-8.709) U3.2@119.047,-9.464 ; 118.735,-5.895 119.751,-4.879 120.015,-4.879 ; C13.2@119.01,-6.632 cw(c121.453,-6.632) 119.726,-4.904 ; v1(126.111,-33.835) 126.111,-5.641 125.349,-4.879 124.714,-4.879 ; 126.111,-25.961 125.73,-25.58 125.73,-5.768 124.841,-4.879 124.714,-4.879 ; 120.015,-4.879 124.714,-4.879 ; C8.1@115.291,-40.516 115.291,-39.575 v1(115.697,-39.169) 115.697,-40.11 C8.1@115.291,-40.516
  Top Layer w0.8: L1.2@115.243,-43.677 C8.1@115.243,-40.564
  Bottom Layer w0.65: v1(115.697,-39.169) J7.2@115.697,-35.74 115.697,-34.851 116.205,-34.343 116.713,-34.343 ; J7.2@115.697,-35.359 116.713,-34.343 ; 124.841,-34.343 v1(126.111,-33.073) v1(126.111,-33.835) 125.603,-34.343 116.713,-34.343
TXD4: D5.1 J4.25 R57.2 R61.1 | length 65.4
  Top Layer w0.3: J4.25@83.541,-78.793 ccw(c82.063,-78.793) 83.108,-77.748 ccw(c84.153,-76.703) J4.25@84.153,-78.181 ; J4.25@84.153,-78.793 82.931,-77.571 82.931,-74.348 83.312,-73.967 98.003,-73.967 D5.1@98.003,-75.888 ; R57.2@90.995,-48.567 97.282,-48.567 98.044,-49.329 98.044,-73.332 ; R57.2@91.215,-48.748 cw(c91.653,-49.186) 91.653,-48.567 cw(c91.653,-47.948) R57.2@91.215,-48.386 ; 98.003,-74.602 98.003,-74.434 97.536,-73.967 98.044,-73.459 98.044,-73.332 ; 98.044,-73.967 98.044,-73.332
  Top Layer w0.65: 97.212,-76.634 ccw(c97.212,-75.222) D5.1@98.361,-76.043 ; D5.1@97.832,-75.665 cw(c95.949,-74.319) 95.949,-76.634 D5.1@98.019,-76.634 ; D5.1@98.019,-76.38 D5.1@98.511,-75.888
UART: J1.2 J4.23 | length 104
  Top Layer w0.3: v1@80.25,-74.743 cw(c79.908,-75.085) 80.391,-75.085 cw(c80.874,-75.085) v1@80.532,-74.743 ; v1@80.25,-74.461 ccw(c79.908,-74.119) 80.391,-74.119 ccw(c80.874,-74.119) v1@80.532,-74.461 ; v1@80.25,-74.108 cw(c79.908,-74.45) 80.391,-74.45 cw(c80.874,-74.45) v1@80.532,-74.108 ; v1(80.391,-73.967) 80.391,-77.571 J4.23@81.613,-78.793 ; 80.568,-77.748 ccw(c81.613,-76.703) J4.23@81.613,-78.181 ; 80.959,-78.139 cw(c80.468,-78.631) J4.23@81.163,-78.631 ; 81.08,-78.26 ccw(c81.613,-77.728) J4.23@81.613,-78.481
  Bottom Layer w0.65: J1.2@38.354,-77.343 38.354,-74.168 39.317,-73.205 79.629,-73.205 80.137,-73.713 ; J1.2@38.989,-77.216 38.989,-74.295 39.571,-73.713 79.502,-73.713 ; 79.717,-73.713 cw(c79.717,-74.641) v1@80.373,-73.985 ; 79.899,-73.475 cw(c78.773,-74.602) v1@80.366,-74.602 ; 79.502,-73.713 80.137,-73.713 ; 79.502,-73.713 v1(80.391,-74.602) v1(80.391,-73.967) 80.137,-73.713
UART1_RXD: D12.1 J9.3 R51.1 T1.1 | length 39.3
  Top Layer w0.3: T1.1@62.484,-56.441 68.834,-56.441 69.088,-56.187 ; T1.1@62.696,-56.78 cw(c63.515,-57.599) 63.515,-56.441 ; T1.1@62.908,-56.992 cw(c64.239,-58.323) 64.239,-56.441 ; T1.1@62.908,-56.144 ccw(c63.626,-55.426) 63.626,-56.441 ; J9.3@68.747,-55.538 cw(c68.299,-56.187) 69.088,-56.187 ; R51.1@68.907,-51.009 cw(c68.469,-51.447) 69.088,-51.447 cw(c69.707,-51.447) R51.1@69.269,-51.009 ; R51.1@69.18,-50.789 ccw(c69.18,-47.895) D12.1@71.227,-49.942 ; R51.1@69.269,-50.971 cw(c69.707,-51.409) 69.707,-50.789 cw(c69.707,-50.17) R51.1@69.269,-50.608 ; J9.3@69.429,-55.538 ccw(c69.877,-56.187) 69.088,-56.187 ; 69.904,-50.789 ccw(c69.904,-48.619) D12.1@71.439,-50.154 ; 70.628,-50.789 ccw(c70.628,-49.343) D12.1@71.651,-50.366 ; 70.713,-50.789 cw(c70.713,-51.516) D12.1@71.227,-51.002 ; D12.1@71.539,-50.789 R51.1@69.088,-50.789 J9.3@69.088,-55.044 69.088,-56.187
  Top Layer w0.45: R51.1@68.96,-50.956 cw(c68.65,-51.266) 69.088,-51.266 cw(c69.526,-51.266) R51.1@69.216,-50.956 ; J9.3@69.088,-55.044 R51.1@69.088,-50.789 71.539,-50.789 D12.1@71.857,-50.472 ; R51.1@69.216,-50.918 cw(c69.526,-51.227) 69.526,-50.789 cw(c69.526,-50.352) R51.1@69.216,-50.661 ; R51.1@69.361,-50.789 ccw(c69.361,-48.076) D12.1@71.28,-49.995 ; 70.447,-50.789 ccw(c70.447,-49.162) D12.1@71.598,-50.313 ; D12.1@70.894,-50.789 cw(c70.894,-51.335) D12.1@71.28,-50.949
UART1_TXD: D11.1 J9.4 R49.1 T2.1 | length 29.3
  Top Layer w0.3: T2.1@62.484,-53.52 64.262,-53.52 64.795,-52.987 D11.1@64.795,-50.789 ; T2.1@62.908,-53.944 cw(c63.933,-54.969) 63.933,-53.52 cw(c63.933,-52.071) T2.1@62.908,-53.096 ; D11.1@64.265,-51.002 cw(c62.984,-52.283) 64.795,-52.283 cw(c66.606,-52.283) D11.1@65.325,-51.002 ; D11.1@64.477,-50.79 cw(c63.709,-51.558) 64.795,-51.558 cw(c65.881,-51.558) D11.1@65.113,-50.79 ; R49.1@67.383,-51.009 cw(c66.945,-51.447) 67.564,-51.447 cw(c68.183,-51.447) R49.1@67.745,-51.009 ; 67.564,-52.885 R49.1@67.564,-50.789
  Top Layer w0.45: D11.1@64.795,-50.789 R49.1@67.564,-50.789 67.564,-54.028 J9.4@66.548,-55.044 ; D11.1@65.054,-50.313 ccw(c66.205,-49.162) 66.205,-50.789 ; D11.1@65.372,-50.949 cw(c65.758,-51.335) D11.1@65.758,-50.789 ; D11.1@65.372,-49.995 ccw(c67.291,-48.076) R49.1@67.291,-50.789 ; J9.4@66.548,-54.519 ccw(c66.548,-53.252) 67.444,-54.148 ccw(c68.34,-55.044) J9.4@67.073,-55.044 ; R49.1@67.436,-50.956 cw(c67.126,-51.266) 67.564,-51.266 cw(c68.002,-51.266) R49.1@67.692,-50.956 ; R49.1@67.436,-50.918 ccw(c67.126,-51.227) 67.126,-50.789 ccw(c67.126,-50.352) R49.1@67.436,-50.661
UART2_RXD: R27.1 U5.56 | length 22.5
  Top Layer w0.3: U5.56@73.144,-46.782 cw(c72.93,-46.996) 73.232,-46.996 cw(c73.534,-46.996) U5.56@73.32,-46.782 ; U5.56@73.232,-45.969 73.232,-47.631 73.914,-48.313 79.502,-48.313 79.883,-48.694 79.883,-51.361 80.391,-51.869 R27.1@89.344,-51.869 ; R27.1@89.125,-52.05 ccw(c88.687,-52.488) 88.687,-51.869 ccw(c88.687,-51.25) R27.1@89.125,-51.688
UART2_TXD: R25.1 U5.55 | length 24.7
  Top Layer w0.3: U5.55@72.144,-46.782 cw(c71.93,-46.996) 72.232,-46.996 cw(c72.534,-46.996) U5.55@72.32,-46.782 ; U5.55@72.232,-45.969 72.232,-48.155 73.152,-49.075 78.867,-49.075 79.248,-49.456 79.248,-52.631 79.883,-53.266 R25.1@89.344,-53.266 ; R25.1@89.125,-53.447 ccw(c88.687,-53.885) 88.687,-53.266 ccw(c88.687,-52.647) R25.1@89.125,-53.085
UART3_RXD: U5.61
UART3_TXD: U5.60
UART4_RXD: R57.1 U5.65 | length 11
  Top Layer w0.3: U5.65@82.144,-46.782 cw(c81.93,-46.996) 82.232,-46.996 cw(c82.534,-46.996) U5.65@82.32,-46.782 ; U5.65@82.232,-45.969 82.232,-48.249 82.55,-48.567 R57.1@89.344,-48.567 ; R57.1@89.125,-48.748 ccw(c88.687,-49.186) 88.687,-48.567 ccw(c88.687,-47.948) R57.1@89.125,-48.386
UART4_TXD: R56.1 U5.64 | length 13.3
  Top Layer w0.3: U5.64@81.144,-46.782 cw(c80.93,-46.996) 81.232,-46.996 cw(c81.534,-46.996) U5.64@81.32,-46.782 ; U5.64@81.232,-45.969 81.232,-49.456 81.74,-49.964 R56.1@89.344,-49.964 ; R56.1@89.125,-50.145 ccw(c88.687,-50.583) 88.687,-49.964 ccw(c88.687,-49.345) R56.1@89.125,-49.783
USB_OTG2_DN: U5.28
USB_OTG2_DP: U5.27
WSDADIO2: J7.5 U3.21 | length 6.5
  Top Layer w0.3: U3.21@111.713,-32.676 cw(c111.294,-33.095) 111.887,-33.095 ; J7.5@111.781,-35.434 ccw(c111.525,-35.178) 111.887,-35.178 ccw(c112.249,-35.178) J7.5@111.993,-35.434 ; J7.5@111.887,-35.74 U3.21@111.887,-32.153 ; 111.887,-33.793 cw(c113.467,-33.793) U3.21@112.35,-32.676 ; 111.887,-33.069 cw(c112.743,-33.069) U3.21@112.138,-32.464
pads on no net: D7.3 J8.0 J10. SW12. U1.9 U3.3 U3.8 U3.9 U3.10 U3.11 U3.12 U3.13 U3.14 U3.25 U3.29 U3.30 U3.32 U3.33 U3.34 U5.2 U5.3 U5.7 U5.8 U5.9 U5.10 U5.11 U5.12 U5.13 U5.17 U5.18 U5.19 U5.20 U5.21 U5.22 U5.30 U5.31 U5.33 U5.34 U5.46 U5.47 U5.48 U5.49 U5.58 U5.63 U5.66 U5.67 U5.78 U5.79 U5.80 U5.81 U5.82 U5.83 U5.84 U5.85 U5.87 U5.88 U5.89 U5.90 U5.91 U5.92 U5.96 U5.97 U5.98 U5.99 U5.100 U5.101 U5.102 U5.103 U5.105 U5.106 U5.107 U5.108 U5.109 U5.110 U5.111 U5.112 U5.114 U5.115 U5.116 U5.117 U5.118 U5.119 U5.120 U5.129 U5.130 U5.131 U5.132 U5.133 U5.134 U5.135 U5.136 U5.137 U5.138 U5.139 U5.140

## Polygon pours and split planes (outlines as drawn)
GND on Top Layer "Top Layer-No Net" (hatched 90Degree grid 0.508 track 0.508, remove dead copper, pour order 1000): 13.462,-128.323 15.24,-130.101 128.397,-130.101 129.667,-128.831 129.667,-103.304 129.032,-102.669 119.126,-102.669 118.491,-102.034 118.491,-73.586 117.729,-72.824 108.585,-72.824 108.585,-58.981 109.093,-58.473 126.492,-58.473 127.127,-57.838 127.127,-13.769 126.873,-13.515 123.19,-13.515 122.936,-13.769 122.936,-33.327 122.301,-33.962 99.822,-33.962 98.933,-33.073 98.933,-12.753 98.298,-12.118 92.202,-12.118 91.821,-11.737 91.821,-6.276 91.313,-5.768 15.367,-5.768 13.335,-7.8
GND on Top Layer "Top Layer-No Net" (hatched 90Degree grid 0.508 track 0.508, remove dead copper, pour order 1001): 13.335,-7.889 13.335,-0.127 13.462,0 33.475,0 33.655,-0.18 33.655,-5.476 31.75,-7.381 13.754,-7.381 13.335,-7.8
GND on Bottom Layer "Top Layer-No Net" (hatched 90Degree grid 0.508 track 0.508, remove dead copper, pour order 1002): 13.462,-127.995 15.24,-129.773 128.397,-129.773 129.667,-128.503 129.667,-102.976 129.032,-102.341 119.126,-102.341 118.491,-101.706 118.491,-73.258 117.729,-72.496 108.585,-72.496 108.585,-58.653 109.093,-58.145 126.365,-58.219 127.127,-57.457 127.127,-13.441 126.873,-13.187 123.19,-13.187 122.936,-13.441 122.936,-32.999 122.301,-33.634 99.822,-33.634 98.933,-32.745 98.933,-12.425 98.298,-11.79 92.202,-11.79 91.821,-11.409 91.821,-5.948 91.313,-5.44 15.367,-5.44 13.462,-7.419
GND on Bottom Layer "Top Layer-No Net" (hatched 90Degree grid 0.508 track 0.508, remove dead copper, pour order 1003): 13.462,-7.673 13.462,0 73.861,0 74.295,-0.434 74.295,-4.551 75.184,-5.44 75.184,-5.73 75.057,-5.857 18.012,-5.857 16.196,-7.673 13.462,-7.673

## Keep-outs
Keep-Out Layer:
  circle w0.127: c124.324,-99.651 r1
  circle w0.127: c128.515,-99.651 r1
  circle w0.127: c128.515,-88.729 r1
  circle w0.127: c124.324,-88.729 r1
  circle w0.127: c134.992,-128.8 r2
  circle w0.127: c134.992,-74.8 r2
  circle w0.127: c134.992,-65.2 r2
  circle w0.127: c134.992,-21.2 r2
  circle w0.127: c6.992,-128.8 r2
  circle w0.127: c6.992,-74.8 r2
  circle w0.127: c6.992,-21.2 r2
  circle w0.127: c6.992,-65.2 r2
  lines w0.127: 0,-120.142 11.049,-120.142 11.049,-103.505 0,-103.505 ; 0,-15.494 11.049,-15.494 11.049,0 ; 130.935,0 130.935,-15.494 141.984,-15.494 ; 141.984,-120.142 130.935,-120.142 130.935,-103.505 141.984,-103.505 ; 0,-134.8 10.492,-134.8 131.492,-134.8 141.984,-134.8 141.984,0 131.492,0 10.492,0 0,0 0,-134.8 ; 46.482,-72.316 95.504,-72.316 95.504,-58.981 46.482,-58.981 46.482,-72.316 ; 108.839,-72.316 118.872,-72.316 cw(c118.872,-72.951) 119.507,-72.951 119.507,-85.143 129.921,-85.143 129.921,-72.316 129.921,-58.981 108.839,-58.981 108.839,-72.316

## Other copper
Top Layer:
  pour cut-out: 58.801,-47.297 67.437,-47.297 67.691,-47.551 67.691,-48.948 67.31,-49.329 64.262,-49.329 63.754,-49.837 64.389,-50.472 64.389,-52.758 64.135,-53.012 61.976,-53.012 60.833,-51.869 60.833,-49.735 60.427,-49.329 58.928,-49.329 58.801,-49.202
  pour cut-out: 99.06,-80.063 101.727,-80.063 101.6,-74.856 98.806,-74.856 98.933,-79.936
  pour cut-out: 46.482,-79.809 47.117,-79.174 60.579,-79.174 60.579,-80.825 59.69,-81.714 46.609,-81.714 46.228,-82.095 46.228,-79.555 46.482,-79.301
  pour cut-out: 55.499,-82.857 55.499,-85.411 57.795,-87.706 67.922,-87.706 68.58,-87.048 68.58,-79.428 68.326,-79.174 62.23,-79.174 58.547,-82.857
  pour cut-out: 110.236,-106.479 122.555,-106.479 123.825,-107.749 123.825,-110.67 121.285,-113.21 121.285,-118.036 120.269,-119.052 119.761,-118.544 111.633,-118.544 110.871,-117.782 110.871,-111.94 110.236,-111.305
  pour cut-out: 101.6,-2.085 101.6,-35.105 101.854,-35.359 123.19,-35.359 124.079,-34.47 124.079,-1.577 122.555,-1.831 101.727,-1.831
  pour cut-out: 34.925,-106.225 34.925,-116.385 35.179,-116.639 39.751,-116.639 40.132,-116.258 40.132,-106.733 39.624,-106.225
  pour cut-out: 61.087,-71.681 61.087,-78.793 61.976,-79.682 79.121,-79.682 79.883,-78.92 79.883,-73.205 78.486,-71.808 61.341,-71.808
  pour cut-out: 26.543,-108.511 30.861,-108.511 30.988,-108.638 30.988,-115.239 32.385,-116.636 34.166,-116.636 35.306,-115.496 39.878,-115.496 39.878,-119.433 39.624,-119.687 28.067,-119.687 26.797,-118.417 26.797,-108.765
  pour cut-out: 41.369,-81.841 42.766,-83.238 42.766,-94.127 43.942,-95.303 46.228,-95.303 46.228,-97.624 42.58,-101.272 26.67,-101.272 25.908,-100.51 25.908,-95.811 26.162,-95.557 22.479,-95.557 22.098,-95.176 22.098,-79.301 23.876,-77.523 23.876,-77.65 28.067,-81.841
  pour cut-out: 96.139,-88.953 100.076,-88.953 100.076,-97.335 100.203,-97.462 96.266,-97.462 96.266,-89.08
  pour cut-out: 38.227,-60.124 38.227,-69.548 38.608,-69.929 41.301,-69.929 42.672,-71.3 42.672,-62.41 40.513,-60.251 38.354,-60.251
  pour cut-out: 32.625,-59.197 32.625,-69 32.766,-69.141 32.258,-69.649 28.321,-69.649 27.813,-69.141 27.813,-62.918 31.534,-59.197
  pour cut-out: 79.248,-83.111 81.788,-83.111 82.042,-83.365 82.042,-85.905 81.661,-86.286 78.994,-86.286 78.867,-86.159 78.867,-83.492
  pour cut-out: 92.202,-79.936 103.124,-79.936 103.505,-79.555 103.505,-74.602 103.378,-74.475 95.123,-74.475 94.869,-74.729 94.869,-77.269
Bottom Layer:
  pour cut-out: 83.693,-88.826 90.17,-88.826 90.932,-88.064 90.932,-83.746 89.916,-82.73 85.09,-82.73 83.439,-84.381 83.439,-88.572
  pour cut-out: 50.546,-83.619 53.721,-83.619 54.483,-82.857 54.483,-84.762 53.848,-85.397 51.181,-85.397 50.546,-84.762
  pour cut-out: 118.999,-108.511 120.142,-109.654 122.174,-109.654 122.174,-117.274 120.015,-119.433 111.633,-119.433 111.633,-117.782 113.411,-116.004 116.459,-116.004 117.856,-114.607 117.856,-109.654
  pour cut-out: 35.433,-120.068 34.163,-121.338 34.163,-126.926 39.116,-126.926 39.243,-126.799 39.243,-120.322 38.989,-120.068
  pour cut-out: 53.467,-79.809 76.152,-79.809 76.533,-79.428 76.533,-75.062 76.327,-74.856 58.42,-74.856

## Silkscreen, mask and mechanical layers (free items; w line width, h text height)
Top Overlay:
  lines w0.127: 69.63,-131.763 69.63,-133.033 70.646,-133.033 ; 71.281,-134.176 73.503,-131.954 ; 73.186,-132.017 73.249,-131.954 73.503,-131.954 ; 73.44,-132.271 73.503,-132.208 73.503,-131.954 ; 74.202,-133.033 75.345,-133.033 75.345,-131.763 ; 79.536,-131.763 79.536,-133.033 80.552,-133.033 ; 81.187,-134.176 83.409,-131.954 ; 83.092,-132.017 83.155,-131.954 83.409,-131.954 ; 83.346,-132.271 83.409,-132.208 83.409,-131.954 ; 84.108,-133.033 85.251,-133.033 85.251,-131.763 ; 89.696,-131.763 89.696,-133.033 90.712,-133.033 ; 91.347,-134.176 93.569,-131.954 ; 93.252,-132.017 93.315,-131.954 93.569,-131.954 ; 93.506,-132.271 93.569,-132.208 93.569,-131.954 ; 94.268,-133.033 95.411,-133.033 95.411,-131.763 ; 70.646,-133.033 70.646,-132.525 74.202,-132.525 74.202,-133.668 70.646,-133.668 70.646,-133.033 ; 80.552,-133.033 80.552,-133.668 84.108,-133.668 84.108,-132.525 80.552,-132.525 80.552,-133.033 ; 90.712,-133.033 90.712,-133.668 94.268,-133.668 94.268,-132.525 90.712,-132.525 90.712,-133.033
  text "10515.0461_全联供输出板_V1.0" at 54.991,-2.667 h2.5
  text "20200301H1.6Sn" at 57.912,-5.207 h2.5
  text "SD" at 99.695,-17.96 h1.5
  text "NANO" at 97.79,-27.739 h1.5
  text "+24V" at 32.766,-73.66 h2
  text "UART" at 37.338,-73.66 h2
  text "GND" at 42.418,-73.713 h2
  text "单线通讯" at 25.654,-77.216 h2
  text "A2" at 53.975,-132.842 h2
  text "GND" at 63.534,-132.885 h2
  text "B2" at 59.343,-132.906 h2
  text "0-10V" at 32.258,-132.946 h2
  text "+24V" at 47.879,-132.969 h2
  text "反馈端" at 37.592,-133.149 h2
  text "+24V" at 27.051,-133.276 h2
  text "GND" at 43.307,-133.35 h2
  text "RS485" at 55.118,-134.419 h2
  text "输出端" at 31.877,-134.493 h2
Bottom Overlay:
  lines w0.127: 10.492,-134.8 10.492,0 ; 131.492,-134.8 131.492,0

## Text inside footprints (layer, text, board x,y; h text height)
J8: Bottom Overlay "2" at 119.824,-120.404 h1.8; Bottom Overlay "8" at 111.696,-119.515 h1.8 r180
U3: Top Overlay "TCM310" at 112.268,-13.134 h1.8 r270